# Altium PCB Main.PcbDoc
Units mm, origin at the board's own origin, x right, y up, seen from the top; angles counter-clockwise.
Board outline 50 x 50 mm, 4 copper layers (Top Layer, Ground Layer, Power Layer, Bottom Layer), stack 1.591 mm thick; 41 components, 25 nets, 175 pads, 47 vias.
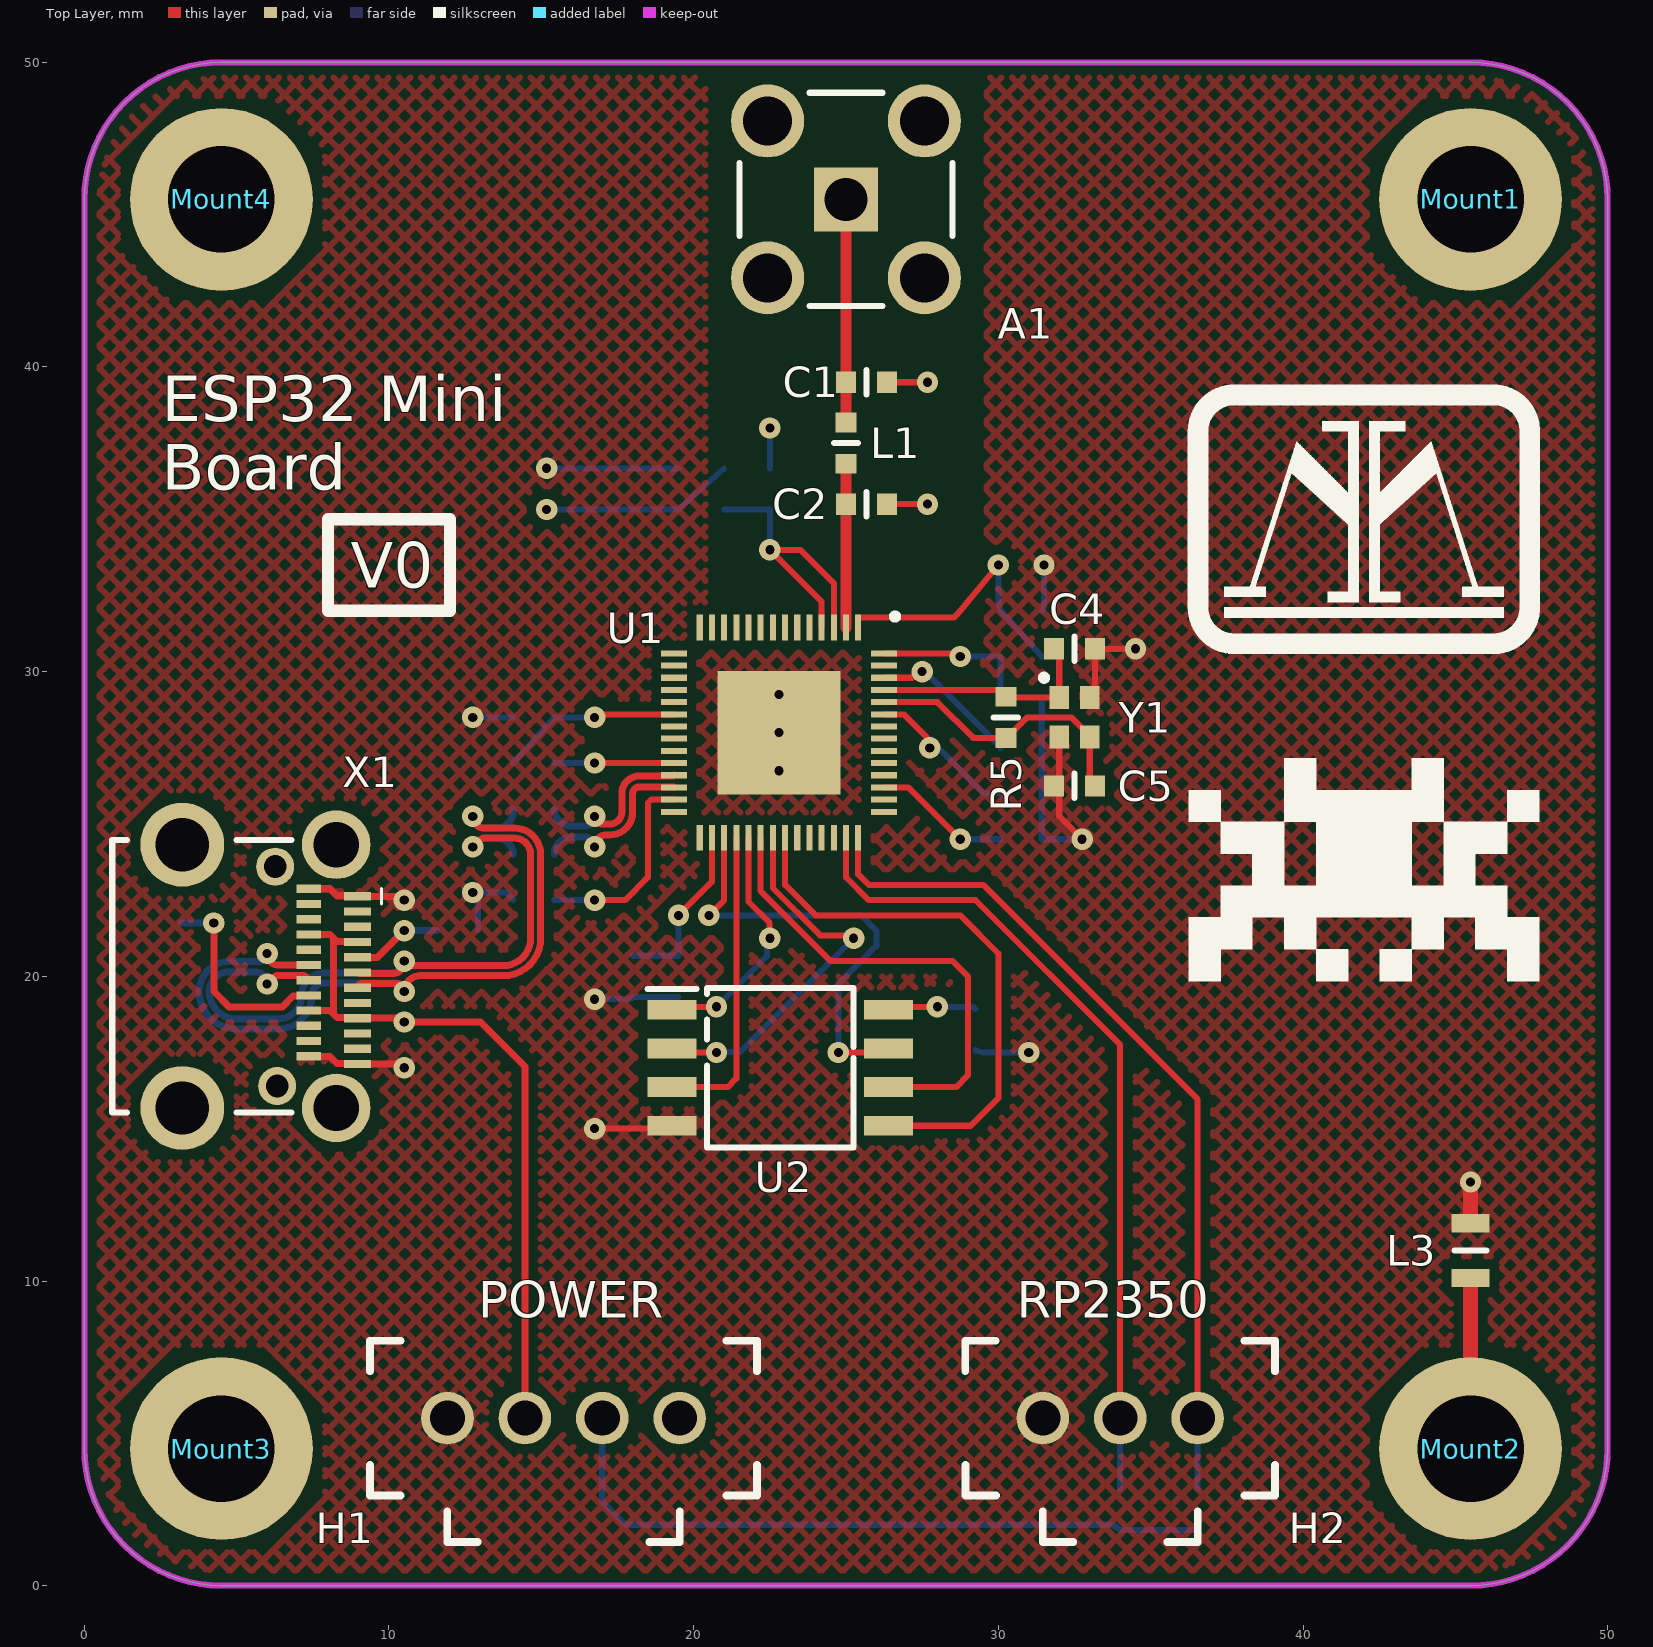
[diagram p0: Top Layer view]
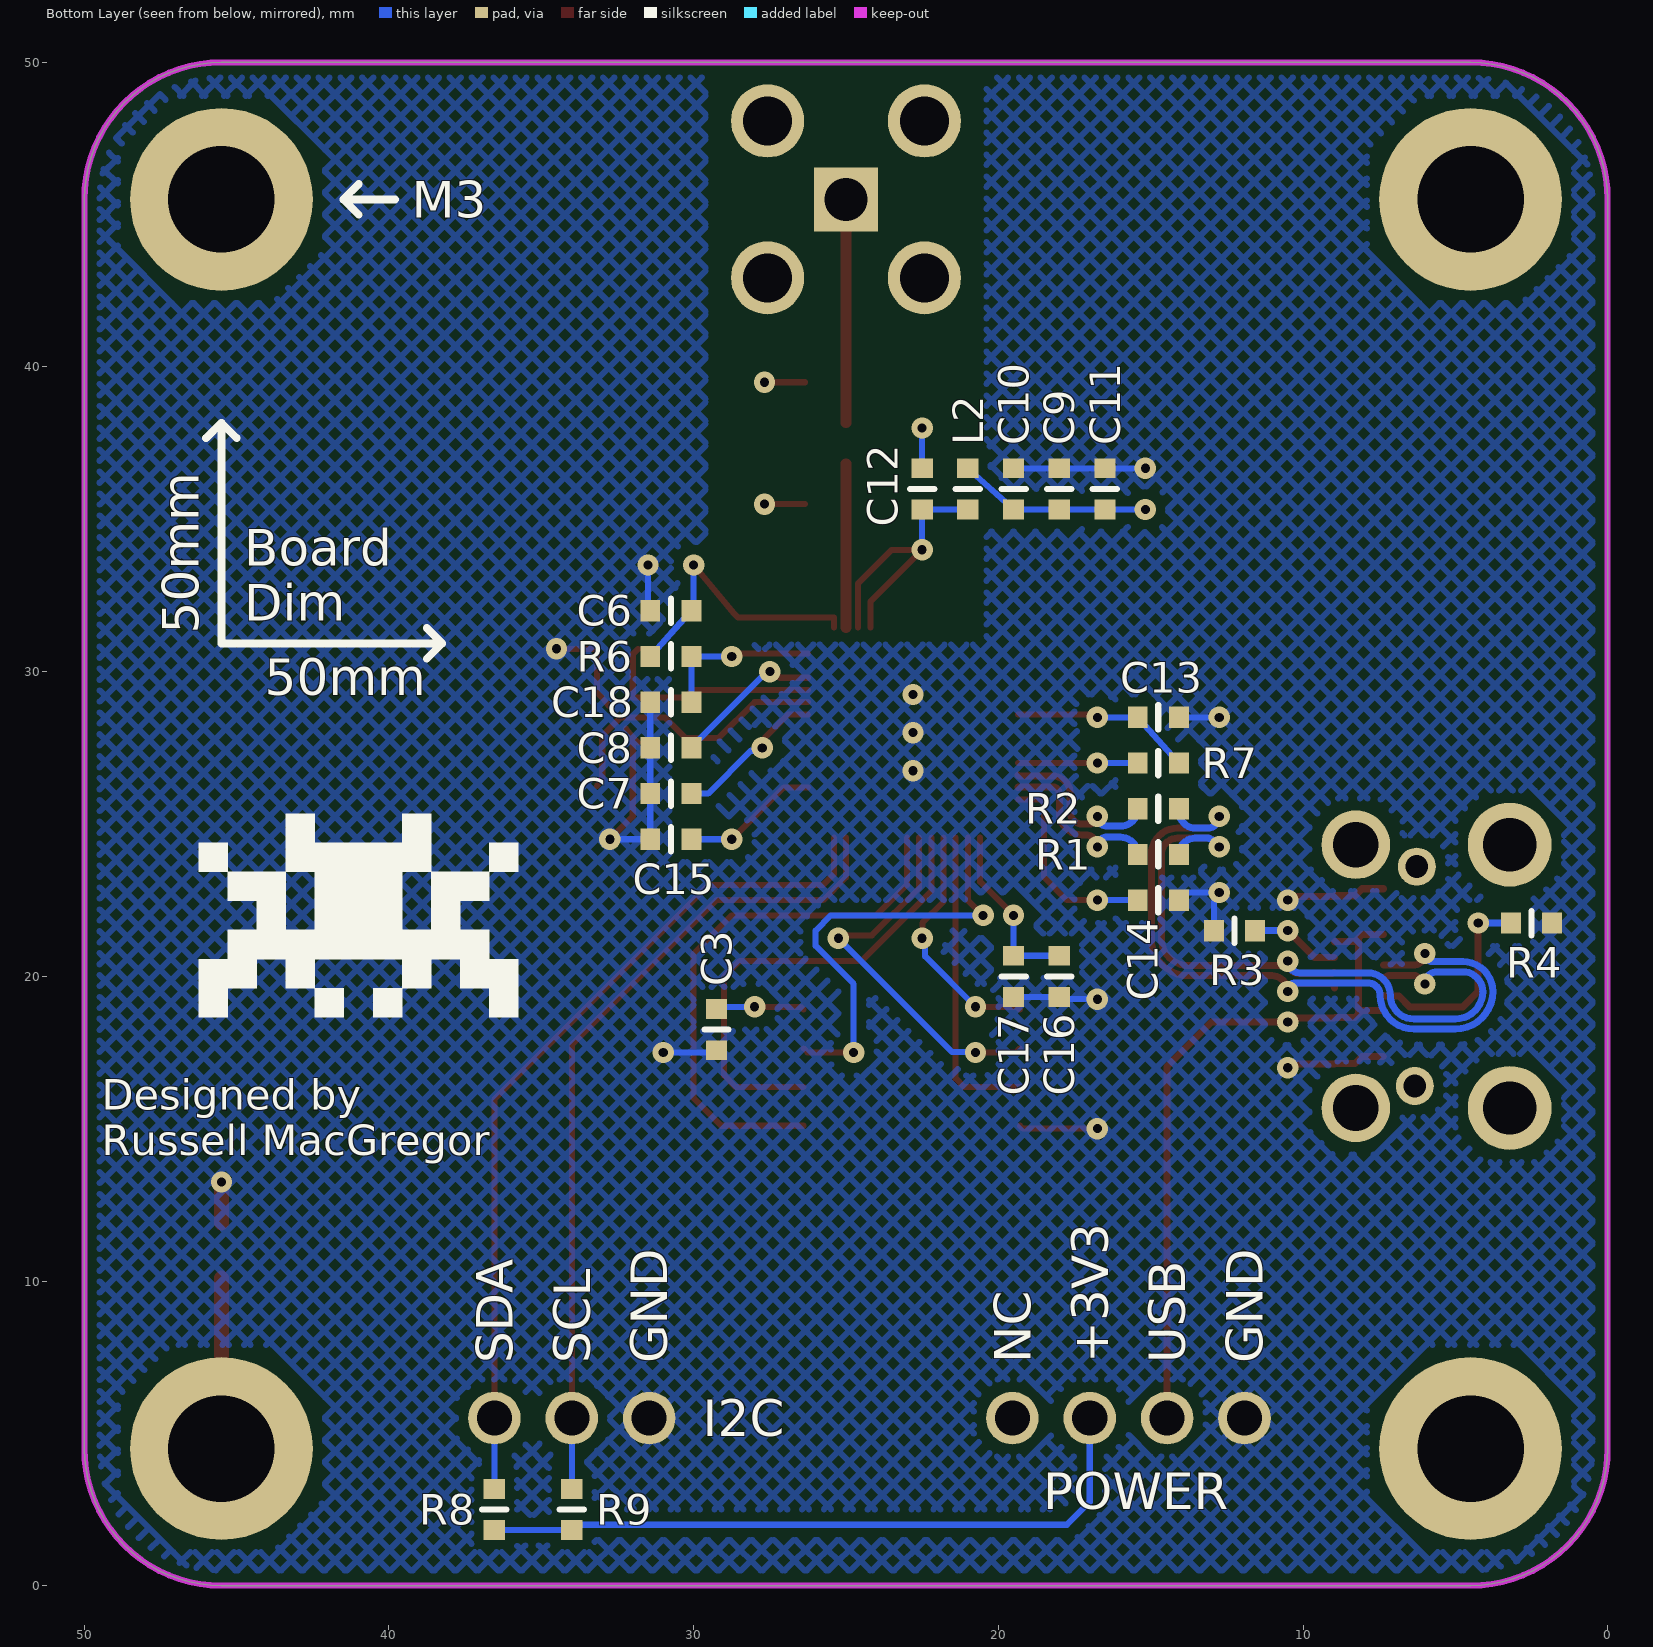
[diagram p1: Bottom Layer view, seen from below]
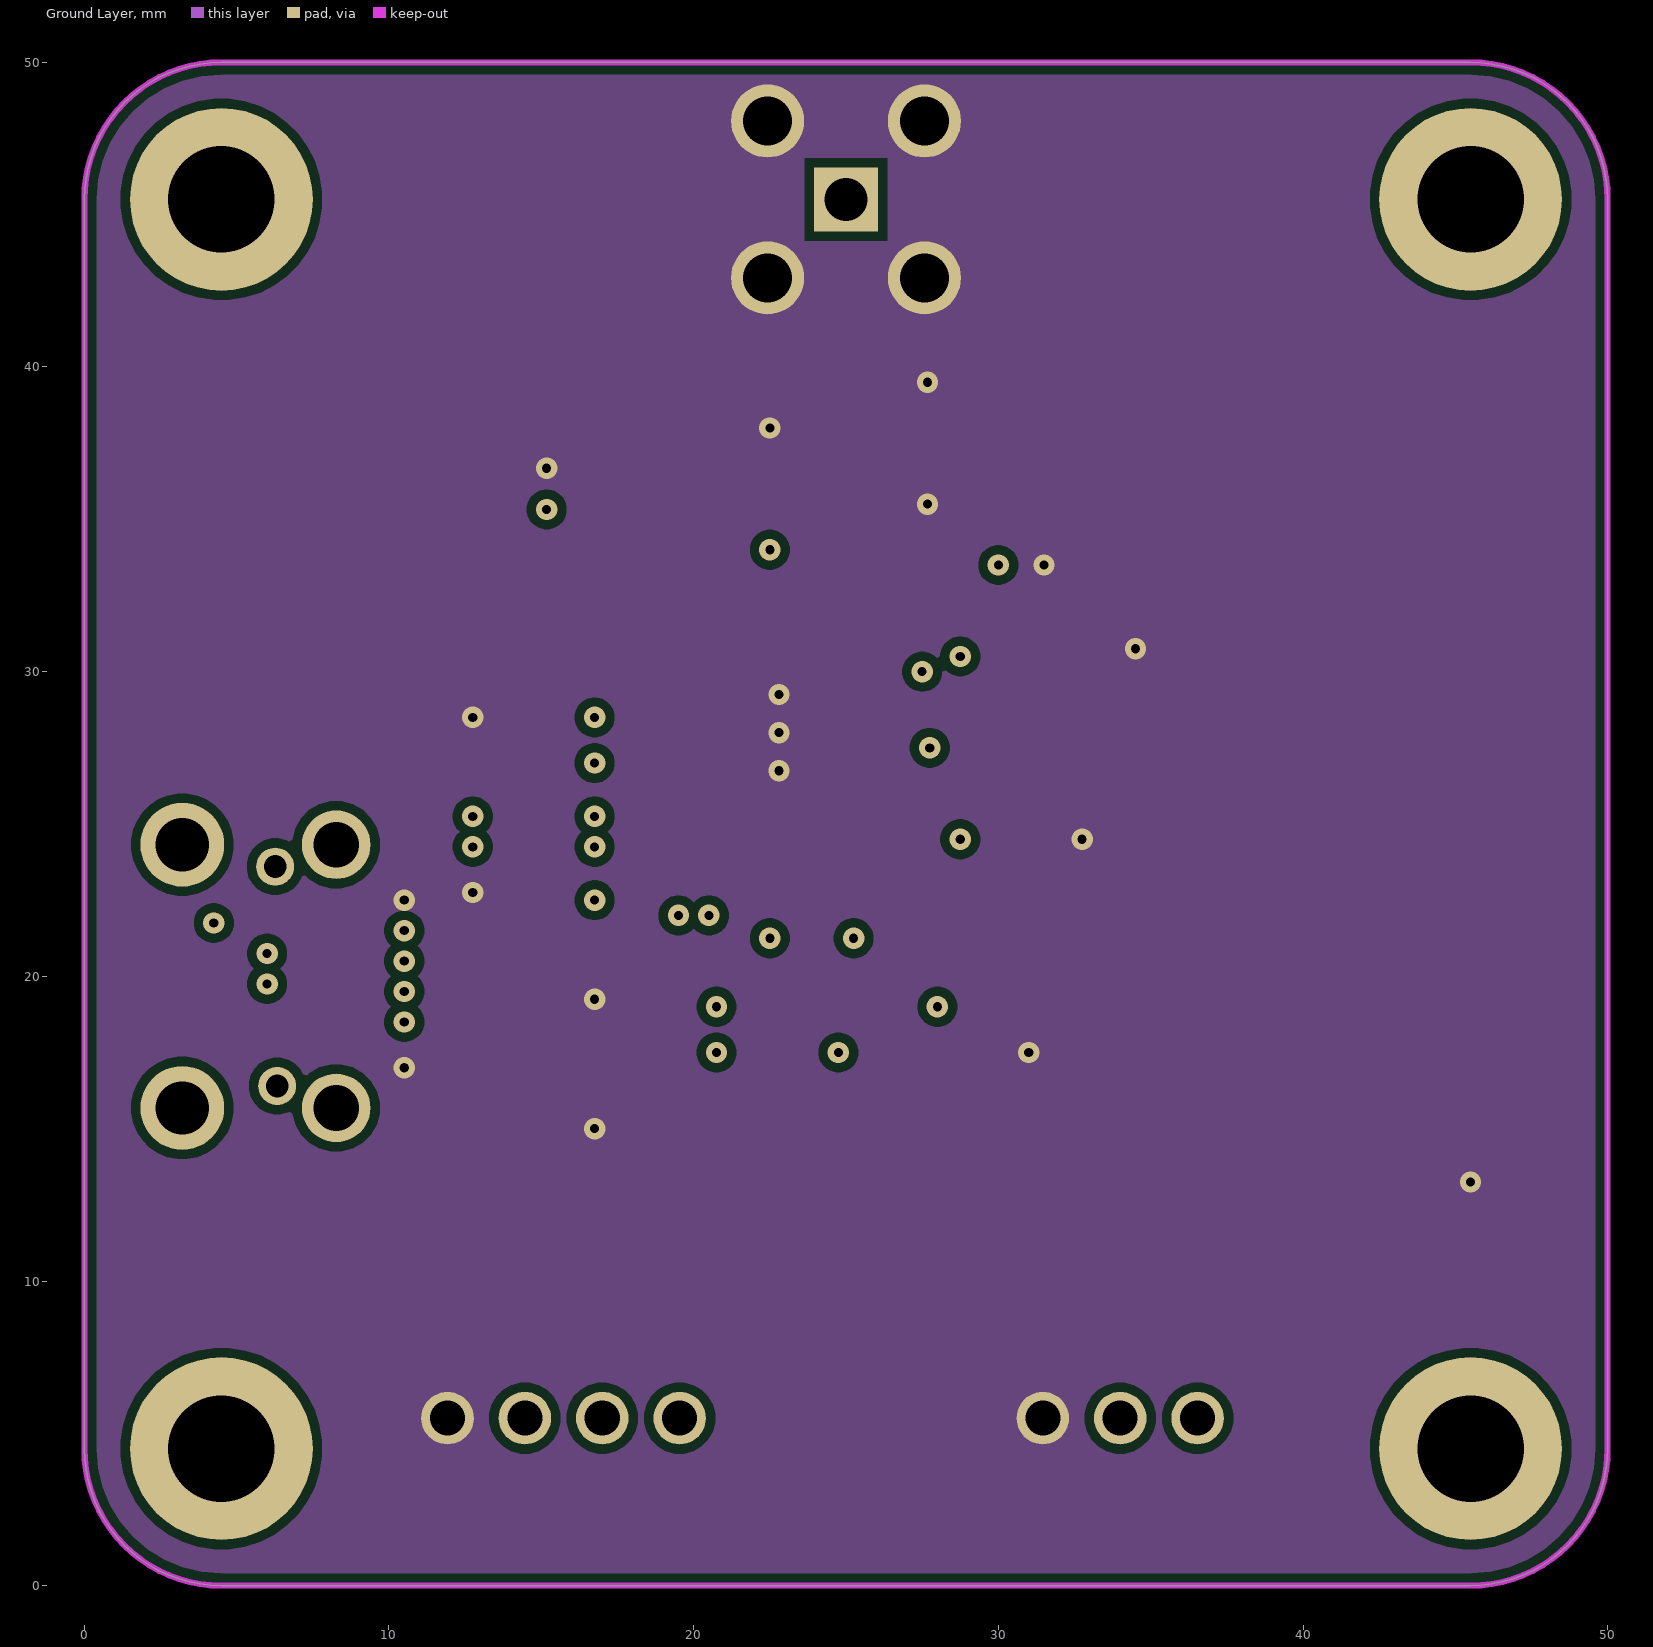
[diagram p2: Ground Layer]
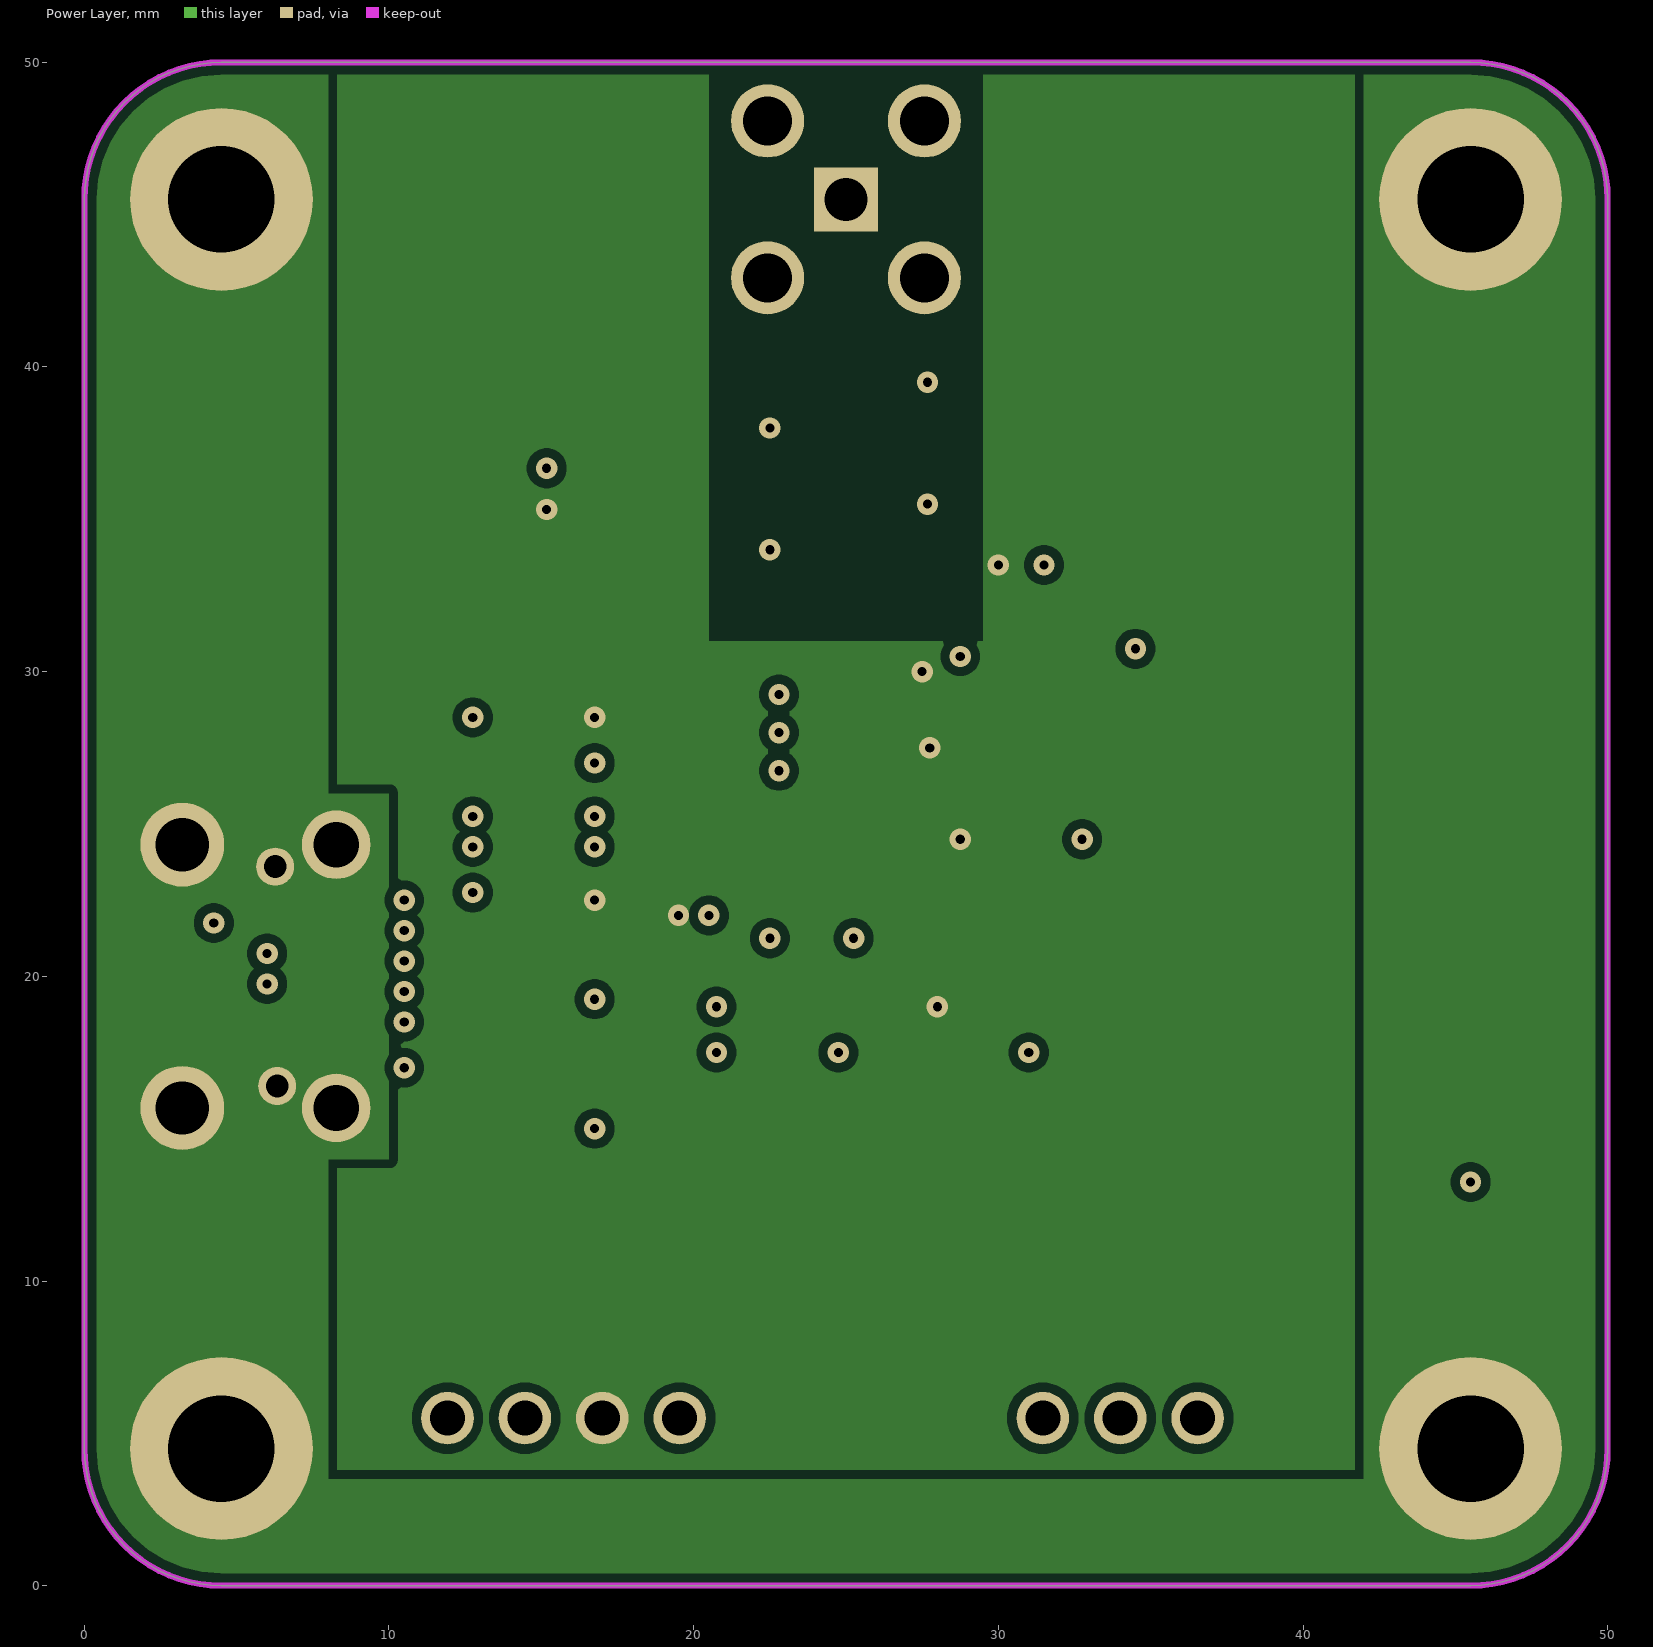
[diagram p3: Power Layer]
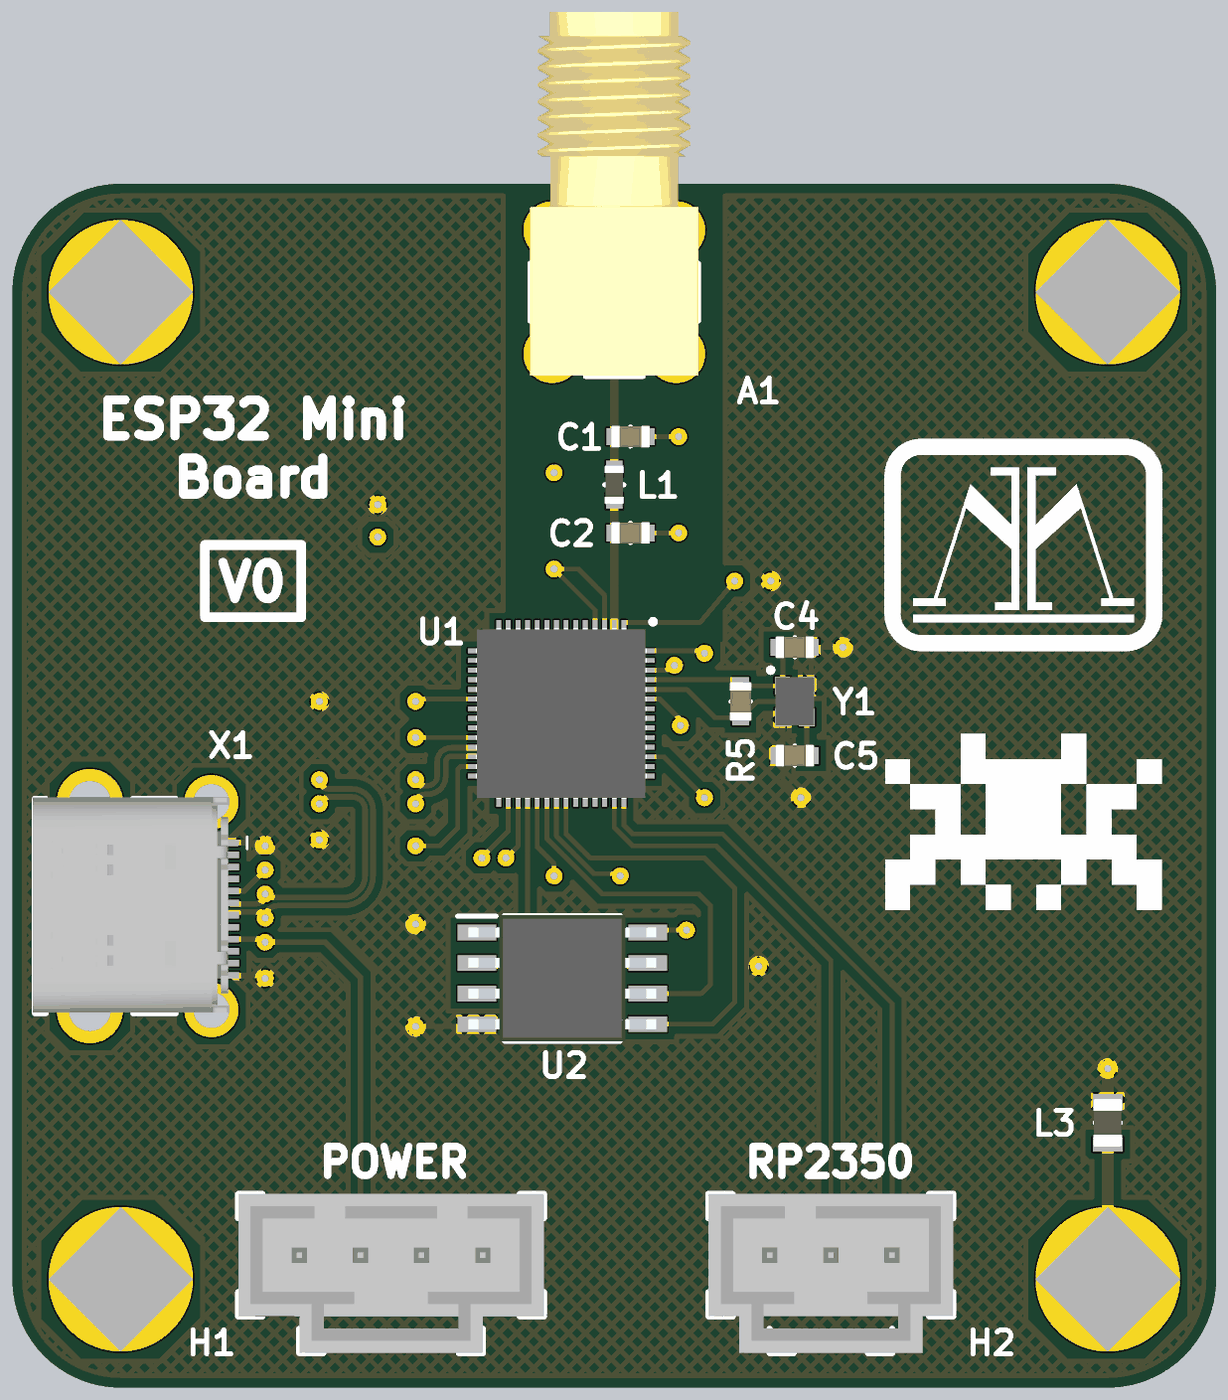
[diagram p4: 3D render of the assembled board from above, using the file's embedded part models]
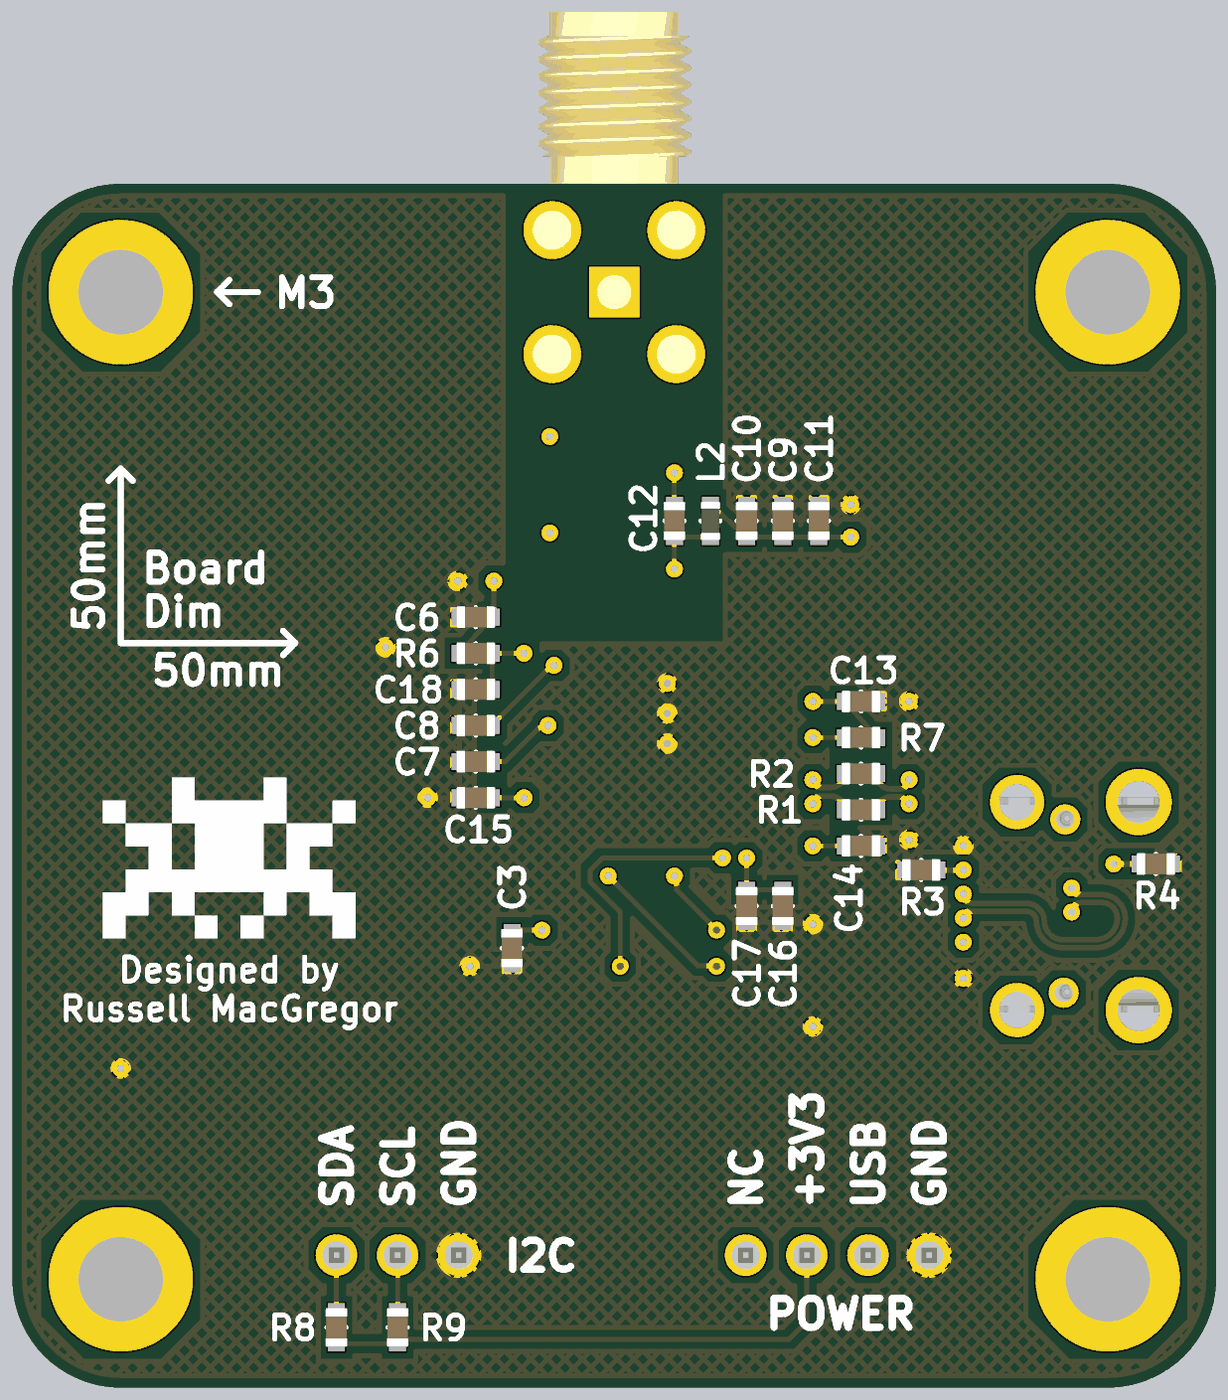
[diagram p5: 3D render of the assembled board from below, using the file's embedded part models]

## Layer stack, top to bottom
Top Solder: solder mask 0.0102, Solder Resist, Dk 3.8
Top Layer: signal copper 0.035
Dielectric 2: prepreg 0.2104, 7628*1, Dk 4.4
Ground Layer: signal copper 0.0175
Dielectric 1: dielectric 1.065, FR-4, Dk 4.8
Power Layer: signal copper 0.0175
Dielectric 3: prepreg 0.2104, 7628*1, Dk 4.4
Bottom Layer: signal copper 0.035
Bottom Solder: solder mask 0.0102, Solder Resist, Dk 3.8

## Board outline
0,4.5 0,45.5 cw(c4.5,45.5) 4.5,50 45.5,50 cw(c45.5,45.5) 50,45.5 50,4.5 cw(c45.5,4.5) 45.5,0 4.5,0 cw(c4.5,4.5)

## Design rules (kind name [scope] priority, off if disabled: settings)
BoardOutlineClearance [All] p1: gap=0.2 ignorepadtopadclearanceinfootprint=FALSE
Clearance "inPolygon Clearance" [InPolygon] p1: gap=0.3 ignorepadtopadclearanceinfootprint=TRUE // this rule ensures that every net within a polygon of a different net has a set clearance from the poly
Clearance "Different Diff Pair" [All] p2: gap=0.2 ignorepadtopadclearanceinfootprint=TRUE
Clearance "Same Diff Pair" [All] p3: gap=0.1 ignorepadtopadclearanceinfootprint=TRUE
Clearance "Different Nets" [not InAnyDifferentialPair] p4: gap=0.3 ignorepadtopadclearanceinfootprint=TRUE except(0.1: Arc-SMDPad Arc-THPad Arc-Via Arc-Text Track-SMDPad Track-THPad Track-Via Track-Text SMDPad-Text THPad-Text Via-Text Fill-Text Poly-Text Region-Text Text-Text; 0.12: Arc-Arc Arc-Track Track-Track; 0.15: SMDPad-SMDPad SMDPad-THPad SMDPad-Via THPad-THPad THPad-Via Via-Via; 0.2: Arc-Hole Track-Hole SMDPad-Hole THPad-Hole Via-Hole Fill-Hole Poly-Hole Region-Hole Text-Hole)
Clearance "Same Net" [not InAnyDifferentialPair] p5: gap=0 ignorepadtopadclearanceinfootprint=TRUE except(0.1: THPad-Via; 0.18: Arc-Arc Arc-Track Track-Track)
ComponentClearance [All] p1: gap=0.102 collisioncheckmode=3 verticalgap=0.102 showdistances=TRUE
DiffPairsRouting "Ethernet Routing" [InDifferentialPairClass('Ethernet_Pairs')] p1: maxlimit=0.25 minlimit=0.2 mostfreqgap=0.25 toplayer_maxgap=0.2 toplayer_prefgap=0.2 toplayer_minwidth=0.25 toplayer_maxwidth=0.25 toplayer_prefwidth=0.25 midlayer1_mingap=0.25 midlayer1_minwidth=0.19 midlayer1_maxwidth=0.19 midlayer1_prefwidth=0.19 midlayer2_mingap=0.25 midlayer2_minwidth=0.19 midlayer2_maxwidth=0.19 midlayer2_prefwidth=0.19 bottomlayer_maxgap=0.2 bottomlayer_prefgap=0.2 bottomlayer_minwidth=0.25 bottomlayer_maxwidth=0.25 bottomlayer_prefwidth=0.25 impedanceprofiledriven=TRUE maxuncoupledlength=12.7
DiffPairsRouting "USB Routing" [InDifferentialPairClass('USB_Pairs')] p2: maxlimit=0.291 minlimit=0.127 mostfreqgap=0.291 toplayer_maxgap=0.127 toplayer_prefgap=0.127 toplayer_minwidth=0.23 toplayer_maxwidth=0.23 toplayer_prefwidth=0.23 midlayer1_mingap=0.291 midlayer1_minwidth=0.25 midlayer1_maxwidth=0.25 midlayer1_prefwidth=0.25 midlayer2_mingap=0.291 midlayer2_minwidth=0.25 midlayer2_maxwidth=0.25 midlayer2_prefwidth=0.25 bottomlayer_maxgap=0.127 bottomlayer_prefgap=0.127 bottomlayer_minwidth=0.23 bottomlayer_maxwidth=0.23 bottomlayer_prefwidth=0.23 impedanceprofiledriven=TRUE impedanceprofileid={36FC4DB9-13AA-42AB-A9B6-D6D0C6769890} impedanceprofilevalue=90.000000 maxuncoupledlength=12.7
DiffPairsRouting "CAN Routing" [InDifferentialPairClass('CAN_Pairs')] p3: maxlimit=0.907 minlimit=0.5 mostfreqgap=0.907 toplayer_maxgap=0.5 toplayer_prefgap=0.5 toplayer_minwidth=0.201 toplayer_maxwidth=0.201 toplayer_prefwidth=0.201 midlayer1_mingap=0.907 midlayer1_minwidth=0.155 midlayer1_maxwidth=0.155 midlayer1_prefwidth=0.155 midlayer2_mingap=0.907 midlayer2_minwidth=0.155 midlayer2_maxwidth=0.155 midlayer2_prefwidth=0.155 bottomlayer_maxgap=0.5 bottomlayer_prefgap=0.5 bottomlayer_minwidth=0.201 bottomlayer_maxwidth=0.201 bottomlayer_prefwidth=0.201 impedanceprofiledriven=TRUE maxuncoupledlength=12.7
Height [All] p1: minheight=0 maxheight=1816.048 prefheight=12.7
HoleSize [All] p1: absolutevalues=TRUE maxlimit=6.3 minlimit=0.3 maxpercent=80.000 minpercent=20.000
HoleToHoleClearance [All] p1: gap=0.25 allowstackedmicrovias=FALSE
Length [All] p1: maxlimit=43.432 minlimit=0 usedelayunits=TRUE mindelay=0.000000 maxdelay=10000.000000
MatchedLengths "Diff Pair Matched Delays" [InDifferentialPairClass('Ethernet_Pairs') or InDifferentialPairClass('USB_Pairs') or InDifferentialPairClass('CAN_Pairs')] p1: tolerance=5 checknetsindiffpair=TRUE checkdiffpairvsdiffpair=FALSE checkxsignals=FALSE checkothers=FALSE usedelayunits=TRUE delaytolerance=100.000000
MinimumAnnularRing [All] p1: minimumring=0.2
MinimumSolderMaskSliver [All] p1: minsoldermaskwidth=0
PlaneClearance "Supply Net Clearance" [InNetClass('Supply_Nets')] p1: clearance=0.5
PlaneClearance "All Nets" [All] p2: clearance=0.3
PolygonConnect "Supply Nets" [InNetClass('Supply_Nets')] p1: connectstyle=Direct reliefconductorwidth=0.3 reliefentries=4 polygonreliefangle="90 Angle" airgapwidth=0.254
PolygonConnect General [All] p2: connectstyle=Relief reliefconductorwidth=0.254 reliefentries=4 polygonreliefangle="90 Angle" airgapwidth=0.254
RoutingVias [All] p1: holewidth=0.2 width=0.35 viastyle="Through Hole" minholewidth=0.15 minwidth=0.3 maxholewidth=6.3 maxwidth=6.55
SilkToSilkClearance [All] p1: silktosilkclearance=0
SilkToSolderMaskClearance [All] p1: minsilkscreentomaskgap=0 clearancetoexposedcopper=TRUE
SolderMaskExpansion [All] p1: expansion=0.075 istentingtop=FALSE
SupplyNets "Schematic Supply Nets_7" [InNet('+3V3')] p1: voltage=0.000
SupplyNets "Schematic Supply Nets_3" [InNet('GND')] p2: voltage=0.000
SupplyNets "Schematic Supply Nets_1" [InNet('Earth')] p3: voltage=0.000
UnRoutedNet [All] p1: checkbadconnections=TRUE
Width "nRF Width" [InNetClass('nRF Signal')] p1: maxlimit=0.35 minlimit=0.263 preferedwidth=0.35 toplayer_minwidth=0.35 midlayer1_maxwidth=0.263 midlayer1_prefwidth=0.263 midlayer2_maxwidth=0.263 midlayer2_prefwidth=0.263 bottomlayer_minwidth=0.35 impedanceprofiledriven=TRUE impedanceprofileid={2219A368-D46E-4E03-A872-572FCDF983D7} impedanceprofilevalue=50.000000 minimp=50.000000 maximp=50.000000 favimp=50.000000 checkconnectedcopper=TRUE
Width [All] p2: maxlimit=100 minlimit=0.1 preferedwidth=0.3
20 further rules are at their usual default settings.

## Classes and differential pairs
differential pair class USB_Pairs: ESP_DX
net class Supply_Nets: +3V3 Earth GND
net class "nRF Signal": LNA-In NetA1_1
component class Connections: H1 H2
differential pair ESP_DX: +ESP_DX_P -ESP_DX_N
differential pair ESP_D: +ESP_D_P -ESP_D_N

## Components (designator, comment, footprint, x,y, rotation, side; value= is the part's Value field where it differs from the comment)
A1 "RP-SMA 50-Ohm" "[SMA] RP-SMA 90deg Jack" 25,45.5 r0 top
C1 "SMD Nonpolarized" "[Cap] SMD 0603" 25.675,39.5 r180 top
C2 "SMD Nonpolarized" "[Cap] SMD 0603" 25.675,35.5 r180 top
C3 "[Cap] SMD Nonpolarized" "[Cap] SMD 0603" 29.25,18.25 r90 bottom
C4 "SMD Nonpolarized" "[Cap] SMD 0603" 32.5,30.75 r180 top
C5 "SMD Nonpolarized" "[Cap] SMD 0603" 32.5,26.25 r0 top
C6 "SMD Nonpolarized" "[Cap] SMD 0603" 30.75,32 r180 bottom
C7 "SMD Nonpolarized" "[Cap] SMD 0603" 30.75,26 r180 bottom
C8 "SMD Nonpolarized" "[Cap] SMD 0603" 30.75,27.5 r180 bottom
C9 "SMD Nonpolarized" "[Cap] SMD 0603" 18,36 r270 bottom
C10 "SMD Nonpolarized" "[Cap] SMD 0603" 19.5,36 r270 bottom
C11 "SMD Nonpolarized" "[Cap] SMD 0603" 16.5,36 r270 bottom
C12 "SMD Nonpolarized" "[Cap] SMD 0603" 22.5,36 r270 bottom
C13 "[Cap] SMD Nonpolarized" "[Cap] SMD 0603" 14.75,28.5 r0 bottom
C14 "[Cap] SMD Nonpolarized" "[Cap] SMD 0603" 14.75,22.5 r0 bottom
C15 "[Cap] SMD Nonpolarized" "[Cap] SMD 0603" 30.75,24.5 r180 bottom
C16 "[Cap] SMD Nonpolarized" "[Cap] SMD 0603" 18,20 r90 bottom
C17 "SMD Nonpolarized" "[Cap] SMD 0603" 19.5,20 r90 bottom
C18 "SMD Nonpolarized" "[Cap] SMD 0603" 30.75,29 r180 bottom
H1 "1x4 Male" "[Header] Shrouded 1x4 Male" 15.73,5.5 r180 top
H2 "1x3 Male" "[Header] Shrouded 1x3 Male" 34,5.5 r180 top
L1 "SMD Inductor" "[Inductor] SMD 0603" 25,37.5 r270 top
L2 "SMD Inductor" "[Inductor] SMD 0603" 21,36 r270 bottom
L3 "652-MH2029-300Y" "[Ferrite] SMD Bead 0805 (1)" 45.5,11 r90 top
Mount1 "M3 Mount Hole" "[Mount] M3 Mount Hole" 45.5,45.5 r0 top
Mount2 "M3 Mount Hole" "[Mount] M3 Mount Hole" 45.5,4.5 r0 top
Mount3 "M3 Mount Hole" "[Mount] M3 Mount Hole" 4.5,4.5 r0 top
Mount4 "M3 Mount Hole" "[Mount] M3 Mount Hole" 4.5,45.5 r0 top
R1 "[Res] SMD Resistor" "[Res] SMD 0603" 14.75,24 r0 bottom
R2 "[Res] SMD Resistor" "[Res] SMD 0603" 14.75,25.5 r0 bottom
R3 "[Res] SMD Resistor" "[Res] SMD 0603" 12.25,21.5 r180 bottom
R4 "[Res] SMD Resistor" "[Res] SMD 0603" 2.5,21.75 r180 bottom
R5 "[Res] SMD Resistor" "[Res] SMD 0603" 30.25,28.5 r90 top
R6 "[Res] SMD Resistor" "[Res] SMD 0603" 30.75,30.5 r180 bottom
R7 "[Res] SMD Resistor" "[Res] SMD 0603" 14.75,27 r0 bottom
R8 "[Res] SMD Resistor" "[Res] SMD 0603" 36.54,2.5 r270 bottom
R9 "[Res] SMD Resistor" "[Res] SMD 0603" 34,2.5 r270 bottom
U1 "ESP32-S2FN4R2" "[MCU] ESP32-S2" 22.8,28 r270 top
U2 "W25Q128JVS" "[Mem] 16Mb Flash Memory" 22.842,17 r0 top
X1 "USB-C" "[Port] USB-C" 5,20 r270 top
Y1 "40MHz Crystal" "[XTAL] SMD 40MHz" 32.5,28.5 r270 top

## Footprints (in the part's own frame and the unit in brackets; to place one, negate y for a bottom-side part, rotate by r counter-clockwise, add the part's x,y. Pads: shape width x height; smd on the part's side, far side on the other; paste and mask are expansions set on the pad)
"[Cap] SMD 0603" [mm]
  rect 0.65x0.7 smd: 1(-0.675,0) 2(0.675,0)
  silkscreen extent 0,-0.4 0,0.4, body extent -0.8,-0.45 0.8,0.45, height 0.8
"[Ferrite] SMD Bead 0805 (1)" [mm]
  rect 0.6x1.25 smd: 1(-0.9,0) 2(0.9,0)
  silkscreen extent 0,-0.53 0,0.53, body extent -1,-0.6 1,0.6, height 1.1
"[Header] Shrouded 1x3 Male" [mm] "070543-0037 / Mates with 005057-9403"
  round 1.725 hole 1.15: 1(-2.54,0) 2(0,0) 3(2.54,0)
  silkscreen extent -5.08,-2.54 5.09,4.06, body extent -5.08,-2.54 5.08,4.06, height 11.67
"[Header] Shrouded 1x4 Male" [mm] "70543-0003 / Mates with 0050579404"
  round 1.725 hole 1.15: 1(-3.81,0) 2(-1.27,0) 3(1.27,0) 4(3.81,0)
  silkscreen extent -6.35,-2.54 6.36,4.06, body extent -6.35,-2.54 6.35,4.06, height 11.64
"[Inductor] SMD 0603" [mm]
  rect 0.65x0.7 smd: 1(-0.675,0) 2(0.675,0)
  silkscreen extent 0,-0.4 0,0.4, body extent -0.8,-0.4 0.8,0.4, height 0.95
"[MCU] ESP32-S2" [mm] "ESP32-S2FN4R2"
  rect 0.85x0.2 smd: 1(-3.45,2.6) 2(-3.45,2.2) 3(-3.45,1.8) 4(-3.45,1.4) 5(-3.45,1) 6(-3.45,0.6) 7(-3.45,0.2) 8(-3.45,-0.2) 9(-3.45,-0.6) 10(-3.45,-1) 11(-3.45,-1.4) 12(-3.45,-1.8) 13(-3.45,-2.2) 14(-3.45,-2.6) 29(3.45,-2.6) 30(3.45,-2.2) 31(3.45,-1.8) 32(3.45,-1.4) 33(3.45,-1) 34(3.45,-0.6) 35(3.45,-0.2) 36(3.45,0.2) 37(3.45,0.6) 38(3.45,1) 39(3.45,1.4) 40(3.45,1.8) 41(3.45,2.2) 42(3.45,2.6)
  rect 0.2x0.85 smd: 15(-2.6,-3.45) 16(-2.2,-3.45) 17(-1.8,-3.45) 18(-1.4,-3.45) 19(-1,-3.45) 20(-0.6,-3.45) 21(-0.2,-3.45) 22(0.2,-3.45) 23(0.6,-3.45) 24(1,-3.45) 25(1.4,-3.45) 26(1.8,-3.45) 27(2.2,-3.45) 28(2.6,-3.45) 43(2.6,3.45) 44(2.2,3.45) 45(1.8,3.45) 46(1.4,3.45) 47(1,3.45) 48(0.6,3.45) 49(0.2,3.45) 50(-0.2,3.45) 51(-0.6,3.45) 52(-1,3.45) 53(-1.4,3.45) 54(-1.8,3.45) 55(-2.2,3.45) 56(-2.6,3.45)
  rect 4.05x4.05 smd: 57(0,0)
  silkscreen extent -3.91,3.71 -3.71,3.91, body extent -3.55,-3.55 3.55,3.55, height 0.9
"[Mem] 16Mb Flash Memory" [mm] "W25Q128JVSIQ TR"
  rect 1.6x0.65 smd: 1(-3.55,1.905) 2(-3.55,0.635) 3(-3.55,-0.635) 4(-3.55,-1.905) 5(3.55,-1.905) 6(3.55,-0.635) 7(3.55,0.635) 8(3.55,1.905)
  silkscreen extent -4.35,-2.61 2.4,2.62, body extent -3.9,-2.61 3.9,2.62, height 1.95
"[Mount] M3 Mount Hole" [mm] "Place at least 4.5mm from board edge. Plated."
  round 6 hole 3.5: 1(0,0)
"[Port] USB-C" [mm]
  rect 0.27x0.9 smd: A1(-2.625,3.965) A2(-2.125,3.965) A3(-1.625,3.965) A4(-1.125,3.965) A5(-0.625,3.965) A6(-0.125,3.965) A7(0.375,3.965) A8(0.875,3.965) A9(1.375,3.965) A10(1.875,3.965) A11(2.375,3.965) A12(2.875,3.965)
  rect 0.27x0.8 smd: B1(2.625,2.365) B2(2.125,2.365) B3(1.625,2.365) B4(1.125,2.365) B5(0.625,2.365) B6(0.125,2.365) B7(-0.375,2.365) B8(-0.875,2.365) B9(-1.375,2.365) B10(-1.875,2.365) B11(-2.375,2.365) B12(-2.875,2.365)
  round 2.25 hole 1.5: MH(-4.32,3.265) MH(4.32,3.265)
  round 2.75 hole 1.75: MH(-4.32,-1.785) MH(4.32,-1.785)
  round 1.25 hole 0.75: MH(-3.6,1.265) MH(3.6,1.33)
  silkscreen extent -4.47,-4.09 4.47,4.75, body extent -4.51,-4.16 4.43,4.01, height 2.92
"[Res] SMD 0603" [mm]
  rect 0.65x0.7 smd: 1(-0.675,0) 2(0.675,0)
  silkscreen extent 0,-0.4 0,0.4, body extent -0.8,-0.45 0.8,0.45, height 0.8
"[SMA] RP-SMA 90deg Jack" [mm]
  rect 2.1x2.1 hole 1.4: 1(0,0)
  round 2.4 hole 1.6: 2(-2.575,-2.575) 3(2.575,-2.575) 4(2.575,2.575) 5(-2.575,2.575)
  silkscreen extent -3.5,-3.5 3.5,3.5, body extent -3.5,-3.46 3.5,11.64, height 9.85
"[XTAL] SMD 40MHz" [mm]
  rect 0.75x0.65 smd: 1(-0.65,-0.5) 2(0.65,-0.5) 3(0.65,0.5) 4(-0.65,0.5)
  silkscreen extent -1.4,-1.1 -1.2,-0.9, body extent -1,-0.8 1,0.8, height 0.69

## Part data
A1: library part "[SMA] RP-SMA 90deg Jack", "PCB.RPSMAFRA.HT", Supplier Part Number 1=931-1360-ND, Supplier 1=DigiKey
C1 C2: library part "[Cap] SMD Nonpolarized", Capacitance=1.2pF, Size Package=0603, Supplier Part Number 1=4713-CHV0603N2501R2BCT-ND, Tolerance=1%, Voltage=6.3V, Supplier 1=DigiKey
C3 C13 C14 C15 C16: Capacitance=100nF, Size Package=0603, Supplier Part Number 1=311-1088-6-ND, Tolerance=5%, Voltage=6.3V, Supplier 1=DigiKey
C4 C5: library part "[Cap] SMD Nonpolarized", Capacitance=6pF, Size Package=0603, Supplier Part Number 1=311-1055-1-ND, Tolerance=1%, Voltage=6.3V, Supplier 1=DigiKey
C6 C7 C10 C17 C18: library part "[Cap] SMD Nonpolarized", Capacitance=1uF, Size Package=0603, Supplier Part Number 1=1276-6524-1-ND, Tolerance=10%, Voltage=6.3V, Supplier 1=DigiKey
C8: library part "[Cap] SMD Nonpolarized", Capacitance=100pF, Size Package=0603, Supplier Part Number 1=490-1427-1-ND, Tolerance=10%, Voltage=6.3V, Supplier 1=DigiKey
C9: library part "[Cap] SMD Nonpolarized", Capacitance=10uF, Size Package=0603, Supplier Part Number 1=587-3258-1-ND, Tolerance=10%, Voltage=6.3V, Supplier 1=DigiKey
C11 C12: library part "[Cap] SMD Nonpolarized", Capacitance=1.8pF, Size Package=0603, Supplier Part Number 1=478-600S1R8BT250XT4KCT-ND, Tolerance=10%, Voltage=6.3V, Supplier 1=DigiKey
H1: library part "[Header] Shrouded 1x4 Male", "70543-0003 / Mates with 005057-9404", Supplier Part Number 1=0705430003, Supplier 1=Avnet
H2: library part "[Header] Shrouded 1x3 Male", "070543-0037 / Mates with 005057-9403", Supplier Part Number 1=WM4825-ND, Supplier 1=DigiKey, Supplier 2=DigiKey, Supplier Part Number 2=WM2901-ND
L1: library part "[Inductor] SMD Inductor", Inductance=2.7nH, Size Package=0603, Supplier Part Number 1=732-7447860027GCT-ND, Supplier 1=DigiKey
L2: library part "[Inductor] SMD Inductor", Inductance=2.0nH, Size Package=0603, Supplier Part Number 1=490-LQW18AS2N0J00DCT-ND, Supplier 1=DigiKey
L3: library part "[Ferrite] SMD Ferrite Bead (1)", Res @ Freq="30 @ 100MHz", Size Package=0805, Supplier Part Number 1=MH2029-300YCT-ND, Supplier 1=DigiKey
Mount1 Mount2 Mount3 Mount4: library part "[Mount] M3 Mount Hole", "Place at least 4.5mm from board edge. Plated."
R1 R2: "Generic", Resistance=27, Size Package=0603, Supplier Part Number 1=749-1631-1-ND, Tolerance=1%, Supplier 1=DigiKey
R3 R4: "Generic", Resistance=5.1k, Size Package=0603, Supplier Part Number 1=311-5.10KHRDKR-ND, Tolerance=1%, Supplier 1=DigiKey
R5: "Generic", Resistance=1Meg, Size Package=0603, Supplier Part Number 1=YAG4498CT-ND, Tolerance=1%, Supplier 1=DigiKey
R6 R7: "Generic", Resistance=10k, Size Package=0603, Supplier Part Number 1=311-10.0KHRCT-ND, Tolerance=5%, Supplier 1=DigiKey
R8 R9: "Generic", Resistance=1k, Size Package=0603, Supplier Part Number 1=P2.0KBDCT-ND, Tolerance=5%, Supplier 1=DigiKey
U1: library part "[MCU] ESP32-S2", Supplier Part Number 1=1965-ESP32-S2FN4R2CT-ND, Supplier 1=DigiKey
U2: library part "[Mem] 16Mb Flash Memory", "W25Q128JVSIQ TR", Supplier Part Number 1=256-W25Q128JVSIQTRCT-ND, Supplier 1=DigiKey
X1: library part "[Port] USB Type-C", Supplier Part Number 1=670-3104-1-ND, Supplier 1=DigiKey
Y1: library part "[XTAL] SMD 40MHz", "CX2016DB40000D0FLJCC", Supplier Part Number 1=478-CX2016DB40000D0FLJCCDKR-ND, Supplier 1=DigiKey

## Via types
v1: diameter 0.7, hole 0.3, Top Layer to Bottom Layer, 47 vias

## Nets (pads, with @x,y where several pads share a name; then routed paths per layer and width w, separated by ;. In a path a pad name is that pad's centre, name@x,y a point inside that pad or via, vN(x,y) a via of type N, cw(c..) or ccw(c..) an arc to the next point about the centre after c; other vN are vias at no path point)
+3V3: C3.2 C6.2 C7.2 C8.2 C9.2 C10.2 C11.2 C13.2 C14.2 C15.2 C16.2 C17.2 H1.2 L2.1 R6.1 R7.1 R8.2 R9.2 U1.1 U1.20 U1.27 U1.30 U1.45 U1.51 U1.54 U2.8 | length 74.2
  Top Layer w0.2: v1(16.75,22.5) 17.75,22.5 18.5,23.25 18.5,25.689 18.611,25.8 U1.27 ; v1(16.75,28.5) 16.885,28.5 16.985,28.6 U1.20 ; v1(19.5,22) 20.6,23.1 U1.30 ; U1.1 25.4,31.775 28.541,31.775 28.662,31.895 28.673,31.908 v1(30,33.5) ; U1.45 27.05,26.2 v1(28.75,24.5) ; U1.51 26.9,28.6 27.654,27.846 27.654,27.596 v1(27.75,27.5) ; U1.54 27.165,29.8 27.365,30 v1(27.5,30) ; U2.8 26.487,19 v1(28,19)
  Bottom Layer w0.2: R7.1 14.3,27.25 15.2,28.25 C13.2 v1(16.75,28.5) ; v1(15.175,35.325) C11.2 C10.2 19.75,35.55 20.75,36.45 L2.1 ; C14.2 v1(16.75,22.5) ; H1.2 17,2.75 17.75,2 33.75,2 R9.2 R8.2 ; C16.2 C17.2 v1(19.5,22) ; v1@27.573,30.027 30.075,27.525 C8.2 ; v1(27.75,27.5) 27.846,27.404 28.121,27.404 29.525,26 C7.2 ; v1(28,19) 29.175,19 C3.2 ; v1(28.75,24.5) C15.2 ; v1(30,33.5) 30,32.25 C6.2 30.3,31.75 31.2,30.75 R6.1
DAC2: R7.2 U1.24 | length 3.9
  Top Layer w0.2: v1(16.75,27) U1.24
  Bottom Layer w0.2: R7.2 v1(16.75,27)
Earth: L3.1 Mount1.1 Mount2.1 Mount3.1 Mount4.1 X1.MH | length 5.6
  Top Layer w0.5: Mount2.1 L3.1
ESP32-SPI-CLK: U1.34 U2.6 | length 15.7
  Top Layer w0.2: U1.34 22.2,22.8 24.5,20.5 28.5,20.5 29,20 29,16.75 28.615,16.365 U2.6
ESP32-SPI-CS0: U1.33 U2.1 | length 8.1
  Top Layer w0.2: U2.1 19.387,19 v1(20.75,19) ; U1.33 21.8,22.45 22.495,21.755 22.495,21.255 v1(22.5,21.25)
  Bottom Layer w0.2: v1(20.75,19) 22.404,20.654 22.404,21.154 v1(22.5,21.25)
ESP32-SPI-D: U1.36 U2.5 | length 18.2
  Top Layer w0.2: U1.36 23,23 24,22 28.75,22 30,20.75 30,16 29.095,15.095 U2.5
ESP32-SPI-HD: U1.31 U2.7 | length 14.7
  Top Layer w0.2: v1(20.5,22) 21,22.5 U1.31 ; v1(24.75,17.5) 26.257,17.5 U2.7
  Bottom Layer w0.2: v1(20.5,22) 25.5,22 26,21.5 26,21 24.75,19.75 v1(24.75,17.5)
ESP32-SPI-Q: U1.35 U2.2 | length 12.6
  Top Layer w0.2: U2.2 19.428,17.5 v1(20.75,17.5) ; U1.35 22.6,22.9 24.154,21.346 25.154,21.346 v1(25.25,21.25)
  Bottom Layer w0.2: v1(20.75,17.5) 20.765,17.515 21.515,17.515 v1(25.25,21.25)
ESP32-SPI-WP: U1.32 U2.3 | length 10.1
  Top Layer w0.2: U2.3 21.115,16.365 21.4,16.65 U1.32
ESP32-USB-5V-VIN: H1.3 X1.A4 X1.A9 X1.B4 X1.B9 | length 23.6
  Top Layer w0.23: X1.B4 8.06,18.875 8.175,18.76 ; X1.B9 8.06,21.375 8.175,21.26 ; X1.A4 8.945,21.145 8.29,21.145 8.175,21.26 ; H1.3 14.46,17.04 13,18.5 v1(10.5,18.5) 10.373,18.5 10.248,18.625 X1.A9 8.945,18.645 8.29,18.645 8.175,18.76 ; 8.175,18.76 8.175,21.26
ESP-PU: C18.2 R6.2 U1.56 | length 5.4
  Top Layer w0.2: U1.56 28.515,30.6 28.615,30.5 v1(28.75,30.5)
  Bottom Layer w0.2: v1(28.75,30.5) R6.2 C18.2
ESP-XTAL1: C4.2 R5.2 U1.53 Y1.1 | length 7.5
  Top Layer w0.2: U1.53 30.025,29.4 30.275,29.15 Y1.1 32,30.575 C4.2
ESP-XTAL2: C5.2 R5.1 U1.52 Y1.3 | length 9.5
  Top Layer w0.2: U1.52 28,29 29.175,27.825 R5.1 30.275,27.825 30.95,28.5 32.4,28.5 33,27.9 Y1.3 33,26.425 C5.2
ESP_D_N: R2.1 X1.A7 X1.B7 | length 27.9
  Top Layer w0.23: v1(6,20.75) ccw(c6.385,20.75) 6.385,20.365 7.365,20.365 X1.B7 ; X1.A7 cw(c9.1,19.625) 9.1,19.76 10.24,19.76 cw(c10.24,19.5) v1(10.5,19.5) cw(c11.02,19.5) 11.02,20.02 13.75,20.02 ccw(c13.75,21.25) 14.98,21.25 14.98,24 ccw(c14.115,24) 14.115,24.865 13.135,24.865 cw(c13.135,25.25) v1(12.75,25.25)
  Bottom Layer w0.23: v1(6,20.75) cw(c5.73,20.75) 5.73,20.48 4.75,20.48 ccw(c4.75,19.5) 3.77,19.5 ccw(c5,19.5) 5,18.27 6.36,18.27 ccw(c6.36,19.375) 7.465,19.375 cw(c7.875,19.375) 7.875,19.785 10.115,19.785 10.26,19.785 cw(c10.26,19.554) 10.475,19.636 cw(c10.115,19.5) v1(10.5,19.5) ; v1(12.75,25.25) ccw(c13.135,25.25) 13.135,24.865 13.525,24.865 ccw(c13.525,25.415) 14.075,25.415 R2.1
ESP_D_P: R1.1 X1.A6 X1.B6 | length 25.4
  Top Layer w0.23: v1(6,19.75) 6.224,19.969 cw(c6.385,19.804) 6.385,20.035 6.872,20.035 cw(c6.871,19.804) 6.919,20.03 ccw(c6.965,20.24) 6.965,20.025 7.15,20.025 cw(c7.149,19.794) 7.357,19.895 X1.B6 ; X1.A6 9.018,20.105 ccw(c9.1,20.321) 9.1,20.09 10.115,20.09 ccw(c10.115,20.475) 10.5,20.475 v1(10.5,20.5) ccw(c10.65,20.5) 10.65,20.35 13.75,20.35 ccw(c13.75,21.25) 14.65,21.25 14.65,24 ccw(c14.115,24) 14.115,24.535 13.135,24.535 ccw(c13.135,24.304) 12.974,24.469 v1(12.75,24.25)
  Bottom Layer w0.23: v1(6,19.75) ccw(c5.6,19.75) 5.6,20.15 4.75,20.15 ccw(c4.75,19.5) 4.1,19.5 ccw(c5,19.5) 5,18.6 6.36,18.6 ccw(c6.36,19.375) 7.135,19.375 cw(c7.875,19.375) 7.875,20.115 10.115,20.115 ccw(c10.115,20.5) v1(10.5,20.5) ; v1(12.75,24.25) 12.974,24.469 cw(c13.135,24.304) 13.135,24.535 13.54,24.535 cw(c13.54,24) R1.1
ESP_DX_N: R2.2 U1.25 | length 5.8
  Top Layer w0.23: v1(16.75,25.25) ccw(c17,25.25) 17,25 17.25,25 ccw(c17.25,25.393) 17.643,25.393 17.643,26 cw(c18.221,26) 18.221,26.579 19.329,26.579 ccw(c19.329,26.6) U1.25
  Bottom Layer w0.23: R2.2 ccw(c15.996,25.5) 15.996,24.929 16.429,24.929 ccw(c16.429,25.25) v1(16.75,25.25)
ESP_DX_P: R1.2 U1.26 | length 5.8
  Top Layer w0.23: v1(16.75,24.25) cw(c17.143,24.25) 17.143,24.643 17.25,24.643 ccw(c17.25,25.393) 18,25.393 18,26 cw(c18.221,26) 18.221,26.221 19.329,26.221 cw(c19.329,26.2) U1.26
  Bottom Layer w0.23: R1.2 cw(c15.996,24) 15.996,24.571 16.429,24.571 cw(c16.429,24.25) v1(16.75,24.25)
GND: A1.2 A1.3 A1.4 A1.5 C1.1 C2.1 C3.1 C4.1 C5.1 C6.1 C7.1 C8.1 C9.1 C10.1 C11.1 C12.1 C13.1 C14.1 C15.1 C16.1 C17.1 C18.1 H1.4 H2.3 L3.2 R3.1 R4.2 U1.57 U2.4 X1.A1 X1.A12 X1.B1 X1.B12 Y1.2 Y1.4 | length 42.4
  Top Layer w0.2: v1(16.75,15) 19.197,15 U2.4 ; C2.1 v1(27.675,35.5) ; C1.1 v1(27.675,39.5) ; Y1.2@31.825,27.675 Y1.2 ; Y1.2@32.225,28.125 Y1.2 ; v1(32.75,24.5) 32,25.25 Y1.2 ; Y1.4@32.775,28.875 Y1.4 33.175,29.325 C4.1 v1(34.5,30.75)
  Top Layer w0.23: X1.B1 8.06,17.375 8.29,17.145 8.945,17.145 X1.A12 10.248,17.125 10.373,17 v1(10.5,17) ; X1.B12 8.06,22.875 8.29,22.645 8.945,22.645 X1.A1 10.248,22.625 10.373,22.5 v1(10.5,22.5)
  Top Layer w0.5: L3.2 v1(45.5,13.25)
  Bottom Layer w0.2: v1(12.75,28.5) C13.1 ; R3.1 12.925,22.44 12.75,22.615 v1(12.75,22.75) 13.85,22.75 14.075,22.525 C14.1 ; v1(15.175,36.675) C11.1 C10.1 ; v1(16.75,19.25) 17.925,19.25 C16.1 C17.1 ; C12.1 v1(22.5,38) ; C3.1 29.5,17.5 v1(31,17.5) ; C18.1 C8.1 C7.1 C15.1 v1(32.75,24.5) ; C6.1 31.5,32.075 v1(31.5,33.5)
  other v1: 22.8,26.75 22.8,28 22.8,29.25
LNA-In: C2.2 L1.2 U1.2 | length 5.4
  Top Layer w0.35: U1.2 C2.2 L1.2
NetA1_1: A1.1 C1.2 L1.1 | length 7.3
  Top Layer w0.35: L1.1 C1.2 A1.1
NetR3_2: R3.2 X1.A5 | length 3
  Top Layer w0.23: X1.A5 9.625,20.625 v1(10.5,21.5)
  Bottom Layer w0.23: v1(10.5,21.5) R3.2
NetR4_1: R4.1 X1.B5 | length 6.8
  Top Layer w0.23: v1(4.25,21.75) 4.25,19.5 4.75,19 6.5,19 6.855,19.355 7.345,19.355 X1.B5
  Bottom Layer w0.23: R4.1 v1(4.25,21.75)
RP_SCL1: H2.2 R9.1 U1.41 | length 27.2
  Top Layer w0.2: U1.41 25,23.25 25.75,22.5 29.25,22.5 34,17.75 H2.2
  Bottom Layer w0.2: R9.1 H2.2
RP_SDA1: H2.1 R8.1 U1.42 | length 28.2
  Top Layer w0.2: U1.42 25.4,23.35 25.75,23 29.5,23 36.54,15.96 H2.1
  Bottom Layer w0.2: R8.1 H2.1
VDD3P3-A: C12.2 L2.2 U1.3 U1.4 | length 10.1
  Top Layer w0.2: U1.4 24.2,32.3 23.273,33.227 v1(22.5,34) 22.505,33.995 23.505,33.995 24.6,32.9 U1.3
  Bottom Layer w0.2: L2.2 C12.2 v1(22.5,34)
pads on no net: H1.1 U1.5 U1.6 U1.7 U1.8 U1.9 U1.10 U1.11 U1.12 U1.13 U1.14 U1.15 U1.16 U1.17 U1.18 U1.19 U1.21 U1.22 U1.23 U1.28 U1.29 U1.37 U1.38 U1.39 U1.40 U1.43 U1.44 U1.46 U1.47 U1.48 U1.49 U1.50 U1.55 X1.A2 X1.A3 X1.A8 X1.A10 X1.A11 X1.B2 X1.B3 X1.B8 X1.B10 X1.B11

## Polygon pours and split planes (outlines as drawn)
+3V3 on Power Layer "+3V3 Power Poly" (solid, remove dead copper, pour order 1): 8,50 42,50 42,3.5 8,3.5 8,14 10,14 10,26 8,26
Earth on Power Layer "Earth Power Poly" (solid, remove dead copper, pour order 0): 0,50 8,50 8,26 10,26 10,14 8,14 8,3.5 42,3.5 42,50 50,50 50,0 0,0
GND on Ground Layer "GND Poly" (solid, remove dead copper, pour order 2): 0,50 50,50 50,0 0,0
GND on Top Layer "Top GND Poly" (hatched 45Degree grid 0.508 track 0.203, remove dead copper, pour order 3): 0,50 50,50 50,0 0,0
GND on Bottom Layer "Bottom GND Poly" (hatched 45Degree grid 0.508 track 0.203, remove dead copper, pour order 4): 0,50 50,50 50,0 0,0

## Keep-outs
Keep-Out Layer:
  the board outline again, w0.2

## Other copper
Top Layer:
  pour cut-out: 20.5,50 29.5,50 29.5,31 20.5,31
Power Layer:
  pour cut-out: 20.5,50 29.5,50 29.5,31 20.5,31
Bottom Layer:
  pour cut-out: 20.5,50 29.5,50 29.5,31 20.5,31

## Silkscreen, mask and mechanical layers (free items; w line width, h text height)
Top Overlay:
  drawing of 13 lines, arcs and shapes, not listed
  text "ESP32 Mini / Board" at 2.538,35.971 h1.5
  text "V0" at 8.75,32.75 h1.5
  text "POWER" at 12.931,8.8 h1.2
  text "RP2350" at 30.601,8.8 h1.2
Bottom Overlay:
  region: 39.925,18.659 39.568,18.659 39.568,19.614 40.521,19.614 40.521,19.613 40.523,19.613 40.523,18.659 39.926,18.659
  region: 35.75,24.119 35.75,24.387 36.703,24.387 36.703,24.385 36.704,24.385 36.704,23.432 35.75,23.432 35.75,24.118
  region: 45.295,23.726 45.295,24.385 45.296,24.385 45.296,24.387 46.25,24.387 46.25,23.432 45.295,23.432 45.295,23.725
  region: 42.432,19.538 42.432,18.659 41.477,18.659 41.477,19.613 41.478,19.613 41.478,19.614 42.432,19.614 42.432,19.539
  region: 38.63,25.341 39.568,25.341 39.568,24.387 42.432,24.387 42.432,25.341 43.386,25.341 43.386,23.432 42.432,23.432 42.432,21.523 43.386,21.523 43.386,23.432 45.295,23.432 45.295,22.479 45.294,22.479 45.294,22.478 44.341,22.478 44.341,21.523 45.294,21.523 45.294,21.522 45.295,21.522 45.295,20.568 46.25,20.568 46.25,18.659 45.295,18.659 45.295,19.614 44.342,19.614 44.342,19.615 44.341,19.615 44.341,20.568 43.386,20.568 43.386,19.615 43.385,19.615 43.385,19.614 42.432,19.614 42.432,20.568 39.568,20.568 39.568,19.614 38.615,19.614 38.615,19.615 38.613,19.615 38.613,20.568 37.659,20.568 37.659,19.615 37.658,19.615 37.658,19.614 36.704,19.614 36.704,18.659 35.75,18.659 35.75,20.568 36.704,20.568 36.704,21.522 36.706,21.522 36.706,21.523 37.659,21.523 37.659,22.478 36.706,22.478 36.706,22.479 36.704,22.479 36.704,23.432 38.613,23.432 38.613,21.523 39.568,21.523 39.568,23.432 38.613,23.432 38.613,25.341 38.629,25.341
  lines w0.254: 38.25,30.932 38.758,30.424 ; 38.758,31.432 38.25,30.924 45.5,30.924 45.5,38.174 46.008,37.666 ; 39.8,45.5 41.5,45.5 40.992,46.008 ; 40.992,45 41.5,45.508 ; 45,37.666 45.508,38.174
  text "M3" at 39.25,44.9 h1.2
  text "Board" at 44.75,33.474 h1.2
  text "Dim" at 44.75,31.674 h1.2
  text "50mm" at 46.25,31.25 h1.2 r270
  text "50mm" at 44.074,29.224 h1.2
  text "Designed by / Russell MacGregor" at 49.422,14.127 h1
  text "GND" at 11.32,7.3 h1.2 r270
  text "USB" at 13.86,7.3 h1.2 r270
  text "+3V3" at 16.4,7.3 h1.2 r270
  text "NC" at 18.94,7.3 h1.2 r270
  text "GND" at 30.86,7.3 h1.2 r270
  text "SCL" at 33.4,7.3 h1.2 r270
  text "SDA" at 35.94,7.3 h1.2 r270
  text "I2C" at 29.7,4.9 h1.2
  text "POWER" at 18.529,2.5 h1.2
Poly Planning:
  lines w0.2: 0,0 50,0 50,50 42,50 42,3.5 8,3.5 8,14 10,14 10,26 8,26 8,50 0,50 0,0 ; 20.5,31 29.5,31 29.5,50 20.5,50 20.5,31